# Altium PCB NESbot Cart PCB.PcbDoc
Units mm, origin at the board's own origin, x right, y up, seen from the top; angles counter-clockwise.
Board outline 100 x 40 mm, 2 copper layers (Top Layer, Bottom Layer); 1 components, 0 nets, 72 pads, 0 vias.
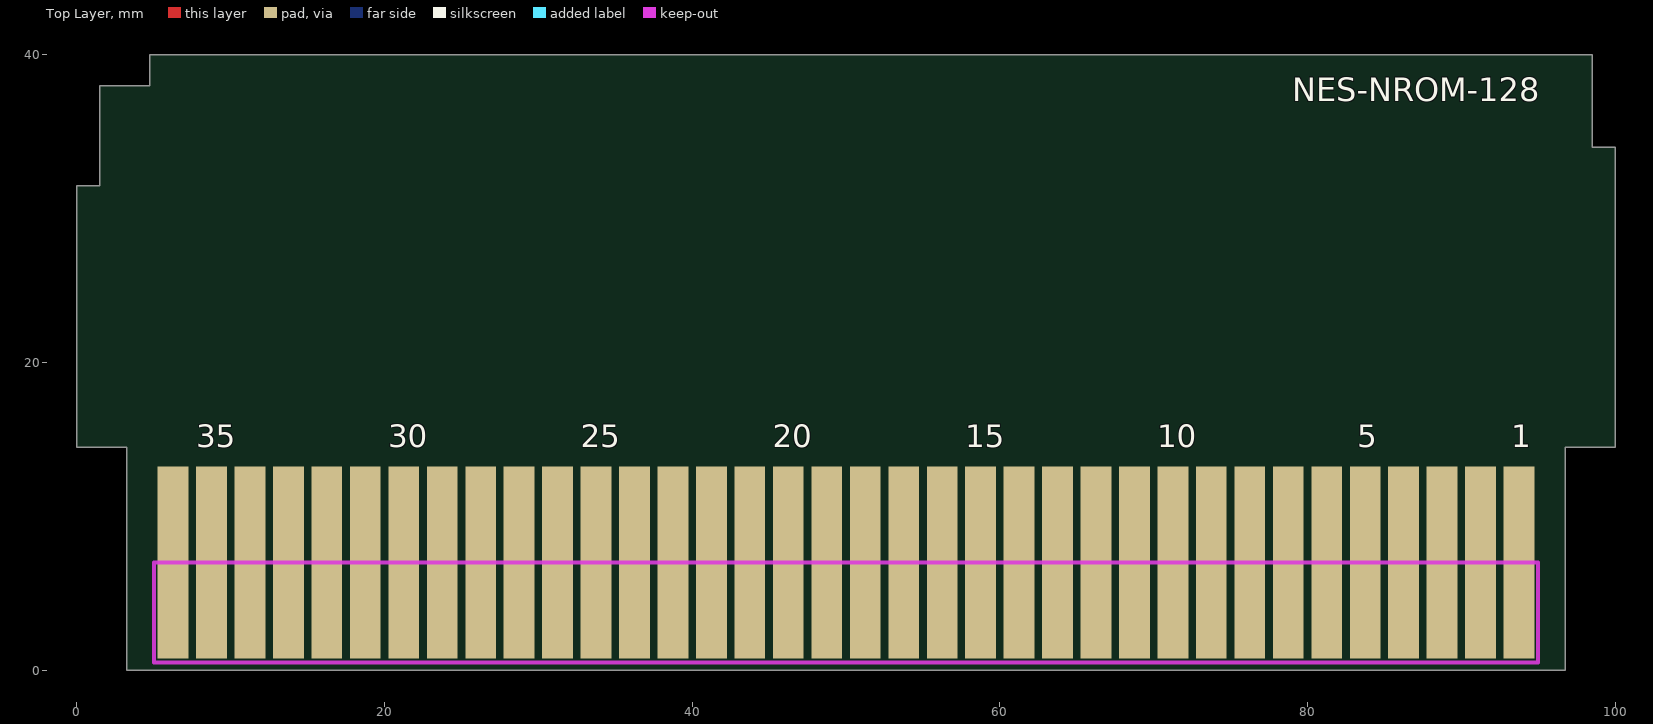
[diagram p0: Top Layer view]
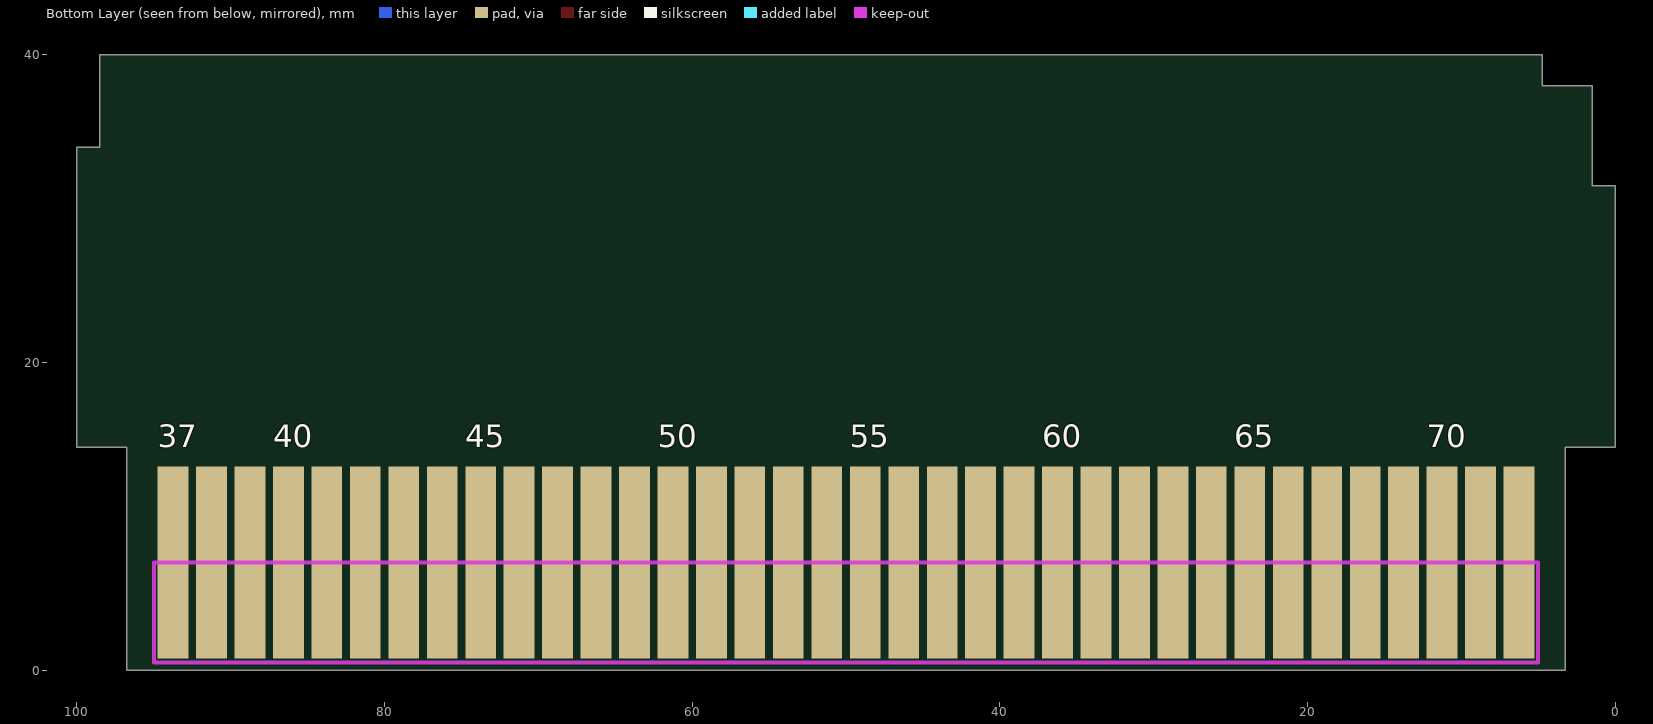
[diagram p1: Bottom Layer view, seen from below]

## Layer stack, top to bottom
Top Layer: signal copper 0.0356
Dielectric: dielectric 0.32, FR-4, Dk 4.8
Bottom Layer: signal copper 0.0356

## Board outline
0,14.5 3.25,14.5 3.25,0 96.75,0 96.75,14.5 100,14.5 100,34 98.5,34 98.5,40 4.75,40 4.75,38 1.5,38 1.5,31.5 0,31.5

## Design rules (kind name [scope] priority, off if disabled: settings)
Clearance [All] p1: gap=0.254
PolygonConnect [All] p1: connectstyle=Relief reliefconductorwidth=0.254 reliefentries=4 polygonreliefangle="90 Angle" airgapwidth=0.254
RoutingVias [All] p1: holewidth=0.711 width=1.27 viastyle="Through Hole" minholewidth=0.711 minwidth=1.27 maxholewidth=0.711 maxwidth=1.27
SolderMaskExpansion [All] p1: expansion=0.102
Width [All] p1: maxlimit=0.254 minlimit=0.254 preferedwidth=0.254
28 further rules are at their usual default settings.

## Components (designator, comment, footprint, x,y, rotation, side; value= is the part's Value field where it differs from the comment)
J? "72 Pin Cart" "72 PIN CART" 50,7 r0 top

## Footprints (in the part's own frame and the unit in brackets; to place one, negate y for a bottom-side part, rotate by r counter-clockwise, add the part's x,y. Pads: shape width x height; smd on the part's side, far side on the other; paste and mask are expansions set on the pad)
"72 PIN CART" [mm] "72 Pin NES Cartridge"
  rect 2x12.5 smd paste-1 mask-1: 1(43.75,0) 2(41.25,0) 3(38.75,0) 4(36.25,0) 5(33.75,0) 6(31.25,0) 7(28.75,0) 8(26.25,0) 9(23.75,0) 10(21.25,0) 11(18.75,0) 12(16.25,0) 13(13.75,0) 14(11.25,0) 15(8.75,0) 16(6.25,0) 17(3.75,0) 18(1.25,0) 19(-1.25,0) 20(-3.75,0) 21(-6.25,0) 22(-8.75,0) 23(-11.25,0) 24(-13.75,0) 25(-16.25,0) 26(-18.75,0) 27(-21.25,0) 28(-23.75,0) 29(-26.25,0) 30(-28.75,0) 31(-31.25,0) 32(-33.75,0) 33(-36.25,0) 34(-38.75,0) 35(-41.25,0) 36(-43.75,0)
  rect 2x12.5 smd far side paste-1 mask-1: 37(43.75,0) 38(41.25,0) 39(38.75,0) 40(36.25,0) 41(33.75,0) 42(31.25,0) 43(28.75,0) 44(26.25,0) 45(23.75,0) 46(21.25,0) 47(18.75,0) 48(16.25,0) 49(13.75,0) 50(11.25,0) 51(8.75,0) 52(6.25,0) 53(3.75,0) 54(1.25,0) 55(-1.25,0) 56(-3.75,0) 57(-6.25,0) 58(-8.75,0) 59(-11.25,0) 60(-13.75,0) 61(-16.25,0) 62(-18.75,0) 63(-21.25,0) 64(-23.75,0) 65(-26.25,0) 66(-28.75,0) 67(-31.25,0) 68(-33.75,0) 69(-36.25,0) 70(-38.75,0) 71(-41.25,0) 72(-43.75,0)
  Keep-Out Layer lines w0.254: -45,-6.5 45,-6.5 45,0 -45,0 -45,-6.5

## Part data
J?: "72 Pin Cartridge Connector"

## Nets (pads, with @x,y where several pads share a name; then routed paths per layer and width w, separated by ;. In a path a pad name is that pad's centre, name@x,y a point inside that pad or via, vN(x,y) a via of type N, cw(c..) or ccw(c..) an arc to the next point about the centre after c; other vN are vias at no path point)
pads on no net: J?.1 J?.2 J?.3 J?.4 J?.5 J?.6 J?.7 J?.8 J?.9 J?.10 J?.11 J?.12 J?.13 J?.14 J?.15 J?.16 J?.17 J?.18 J?.19 J?.20 J?.21 J?.22 J?.23 J?.24 J?.25 J?.26 J?.27 J?.28 J?.29 J?.30 J?.31 J?.32 J?.33 J?.34 J?.35 J?.36 J?.37 J?.38 J?.39 J?.40 J?.41 J?.42 J?.43 J?.44 J?.45 J?.46 J?.47 J?.48 J?.49 J?.50 J?.51 J?.52 J?.53 J?.54 J?.55 J?.56 J?.57 J?.58 J?.59 J?.60 J?.61 J?.62 J?.63 J?.64 J?.65 J?.66 J?.67 J?.68 J?.69 J?.70 J?.71 J?.72

## Silkscreen, mask and mechanical layers (free items; w line width, h text height)
Top Overlay:
  text "NES-NROM-128" at 79,37 h1.52
Board Outline:
  the board outline again, w0.254

## Text inside footprints (layer, text, board x,y; h text height)
J?: Top Overlay "5" at 83.25,14 h2.5; Top Overlay "10" at 70.25,14 h2.5; Top Overlay "15" at 57.75,14 h2.5; Top Overlay "20" at 45.25,14 h2.5; Top Overlay "25" at 32.75,14 h2.5; Top Overlay "30" at 20.25,14 h2.5; Top Overlay "35" at 7.75,14 h2.5; Top Overlay "1" at 93.25,14 h2.5; Bottom Overlay "37" at 94.75,14 h2.5; Bottom Overlay "40" at 87.25,14 h2.5; Bottom Overlay "45" at 74.75,14 h2.5; Bottom Overlay "50" at 62.25,14 h2.5; Bottom Overlay "55" at 49.75,14 h2.5; Bottom Overlay "60" at 37.25,14 h2.5; Bottom Overlay "65" at 24.75,14 h2.5; Bottom Overlay "70" at 12.25,14 h2.5